# Allegro board BeforeAutoTrace.brd
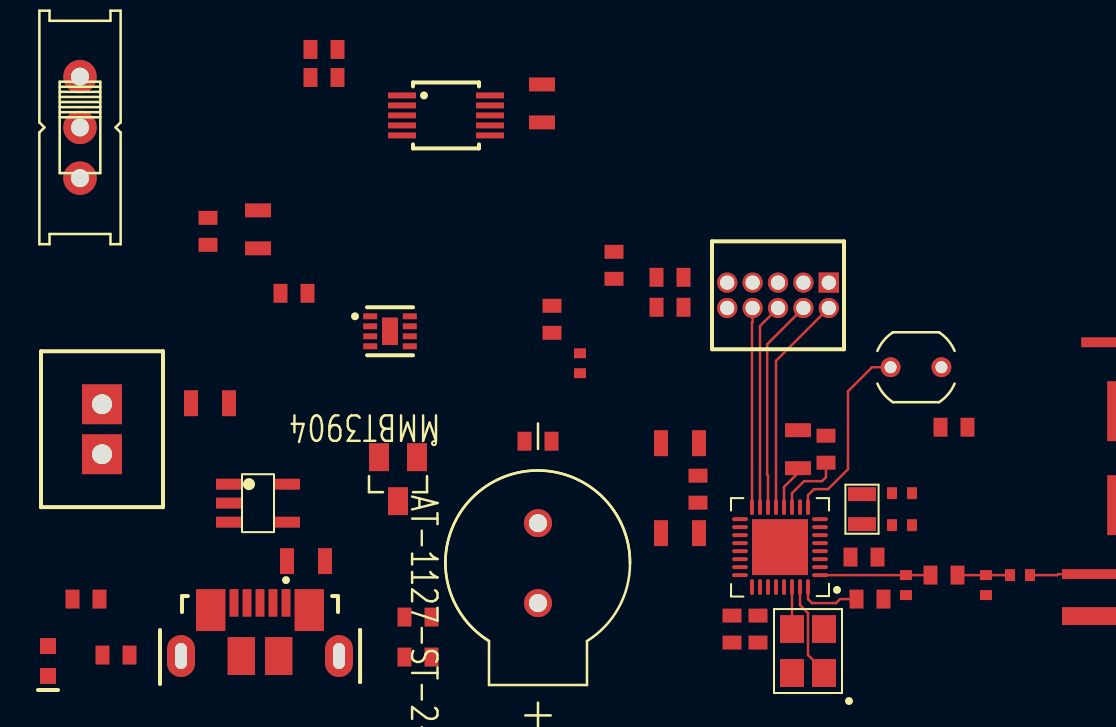
[diagram p0: board, top side]
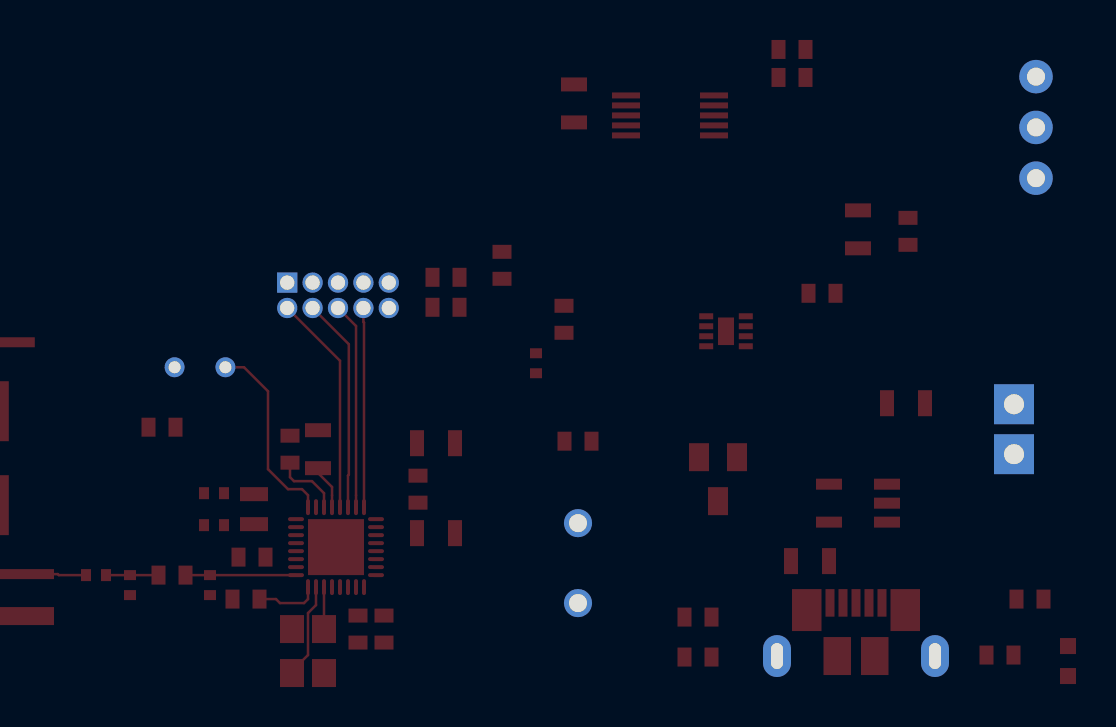
[diagram p1: board, bottom side, seen from below]

No outline. copper layers: TOP, BOTTOM. Coordinates in mm from the lowest, leftmost part position.

## Design rules (mm)
constraint set DEFAULT: min track width 0.127

## Placement (name value [footprint] x y rotation side)
A1  TI AN043  [AN043_PATCH_ANTENNA]  51.2 1.3 270 top
BJT1  MMBT3904  [SOT95P240X120-3N]  17.5 9.1 180 top
BUZ1  AT-1127-ST-2-R  [XDCR_AT-1127-ST-2-R]  24.5 4.9 270 top
C1  12p  [0402_C]  42.7 6.8 0 top
C2  12p  [0402_C]  42.7 8.4 0 top
C3  1uF  [0805_C]  37.5 10.6 270 top
C4  100nF  [0603_C]  38.9 10.6 90 top
C5  100nF  [0603_C]  34.2 1.6 270 top
C6  10uF  [0805_C]  31.6 6.4 180 top
C7  10uF  [0805_C]  31.6 10.9 180 top
C8  100nF  [0603_C]  28.3 19.8 90 top
C9  100nF  [0603_C]  41.1 3.1 0 top
C10  100nF  [0603_C]  35.5 1.6 270 top
C11  12pF  [0402_C]  48.6 4.3 0 top
C12  1.2pF  [0402_C]  42.9 3.8 270 top
C13  1.2pF  [0402_C]  46.9 3.8 270 top
C14  100nF  [0603_C]  31.1 17.7 180 top
C15  330nF  [0603_C]  25.2 17.1 270 top
C16  10uF  [0805_C]  24.7 27.9 90 top
C17  10uF  [0805_C]  10.5 21.6 270 top
C18  1uF  [0805_C]  8.1 12.9 0 top
C19  100nF  [0603_C]  8 21.5 270 top
C20  1uF  [0805_C]  12.9 5 0 top
CHC1  MAXIM MAX1555  [SMD_MAX1555]  10.5 7.9 270 top
CON1  JST B2B-XH-A LF SN  [B2B-XH-A]  2.7 11.6 90 top
CYS1  24MHz  [TSX-3225_XTAL]  38 0.5 90 top
CYS2  32.768MHz  [SC-20S_XTAL]  40.7 7.6 90 top
FG1  MAXIM MAX17048  [MAX17048]  17.1 16.5 270 top
J1  SAMTEC FTSH-105-01-L-D-K  [SAMTEC_FTSH-105-01-L-D-K]  36.5 18.3 180 top
L1  10uH  [0603_L]  32.5 8.6 90 top
L2  FerriteBead  [0402_L]  26.6 14.9 270 top
L3  15nH  [0603_L]  40.8 5.2 0 top
L4  2nH  [0603_L]  44.8 4.3 0 top
LED1  GEN  [0603_LED]  0 0 90 top
LS1  -  [PDV-P8001]  43.4 14.7 0 top
M1  TI CC2640R2F RSM  [CC2640R2FRSM]  36.6 5.7 90 top
R1  33  [0603_R]  18.5 2.2 0 top
R2  2k  [0603_R]  24.5 11 180 top
R3  2k  [0603_R]  45.3 11.7 0 top
R4  100K  [0603_R]  31.1 19.2 0 top
R5  33K  [0603_R]  3.4 0.3 0 top
R6  3.3K  [0603_R]  12.3 18.4 180 top
R7  220  [0603_R]  13.8 29.2 0 top
R8  220  [0603_R]  13.8 30.6 0 top
R9  200  [0603_R]  1.9 3.1 180 top
R10  33K  [0603_R]  18.5 0.2 0 top
SW1  SIS  [EG1218]  1.6 26.7 270 top
USB1  MOLEX 1051640001  [MOLEX_105164-0001]  10.6 1.8 0 top
VR1  MAXIM MAX1759  [MAX1759]  19.9 27.3 270 top

## Library data of the parts
A1 = ANTENNA
BJT1 = MMBT3904
BUZ1 = AT-1127-ST-2-R
C1-C20 = CAP
CHC1 = MAX1555
CON1 = JST B2B-XH-A LF SN
CYS1 = CRYSTAL_24M
CYS2 = CRYSTAL_32768
FG1 = MAXIM MAX17048
J1 = SAMTEC FTSH-105-01-L-D-K
L1 L3 L4 = IND
L2 = FerriteBead
LED1 = LED
LS1 = PDV-P8001
M1 = CC2640
R1-R10 = RES
SW1 = SIS
USB1 = MOLEX 1051640001
VR1 = MAX1759

## Footprints (pads in the part's own frame, mm; a bottom-side part is the same pattern mirrored in y, then rotated)
0402_C
  rect 0.5x0.6 smd: 1(-0.5,0) 2(0.5,0)
0402_L
  rect 0.5x0.6 smd: 1(-0.5,0) 2(0.5,0)
0603_C
  rect 0.7x0.95 smd: 1(-0.675,0) 2(0.675,0)
0603_L
  rect 0.7x0.95 smd: 1(-0.675,0) 2(0.675,0)
0603_LED
  rect 0.8x0.8 smd: 1(-0.75,0) 2(0.75,0)
0603_R
  rect 0.7x0.95 smd: 1(-0.675,0) 2(0.675,0)
0805_C
  rect 0.7x1.3 smd: 1(-0.95,0) 2(0.95,0)
AN043_PATCH_ANTENNA
  rect 0.9x0.5 smd: 1(-0.95,-0.25)
  rect 0.5x0.5 smd: 2(-3.05,-0.25)
B2B-XH-A
  rect 2x2 hole 1: 1(-1.25,0) 2(1.25,0)
CC2640R2FRSM
  rrect 0.2x0.8 smd: 1(-1.4,-2) 2(-1,-2) 3(-0.6,-2) 4(-0.2,-2) 5(0.2,-2) 6(0.6,-2) 7(1,-2) 8(1.4,-2) 24(-1.4,2)
  rrect 0.8x0.2 smd: 9(2,-1.4) 10(2,-1) 11(2,-0.6) 12(2,-0.2) 13(2,0.2) 14(2,0.6) 15(2,1) 16(2,1.4) 25(-2,1.4) 26(-2,1) 27(-2,0.6) 28(-2,0.2) 29(-2,-0.2) 30(-2,-0.6) 31(-2,-1) 32(-2,-1.4)
  rrect 0.2x0.8 smd rot 0.2: 17(1.4,2) 18(1,2) 19(0.6,2) 20(0.2,2) 21(-0.2,2) 22(-0.6,2) 23(-1,2)
  rect 2.8x2.8 smd: 33(0,0)
EG1218
  round 1.676 hole 0.9: O(-2.54,0) P(0,0) S(2.54,0)
MAX1759
  rect 0.3x1.4 smd: 1(-1,-2.2) 2(-0.5,-2.2) 3(0,-2.2) 4(0.5,-2.2) 5(1,-2.2) 6(1,2.2) 7(0.5,2.2) 8(0,2.2) 9(-0.5,2.2) 10(-1,2.2)
MAX17048
  rect 0.3x0.7 smd: 1(-0.75,-0.99) 2(-0.25,-0.99) 3(0.25,-0.99) 4(0.75,-0.99) 5(0.75,0.99) 6(0.25,0.99) 7(-0.25,0.99) 8(-0.75,0.99)
  rect 1.38x0.8 smd: 9(0,0)
MOLEX_105164-0001
  rect 0.45x1.38 smd: 1(1.3,1.11) 2(0.65,1.11) 3(0,1.11) 4(-0.65,1.11) 5(-1.3,1.11)
  rect 1.375x1.9 smd: P1(-0.938,-1.55) P2(0.938,-1.55)
  rect 1.475x2.1 smd: P3(-2.462,0.75) P4(2.462,0.75)
  oval 1.4x2.1 hole 0.6x1.3: S1(-3.95,-1.55) S2(3.95,-1.55)
PDV-P8001
  round 1 hole 0.6: 1(-1.27,0) 2(1.27,0)
SAMTEC_FTSH-105-01-L-D-K
  rect 1.016x1.016 hole 0.711: 1(-2.54,-0.635)
  round 1.016 hole 0.711: 2(-2.54,0.635) 3(-1.27,-0.635) 4(-1.27,0.635) 5(0,-0.635) 6(0,0.635) 7(1.27,-0.635) 8(1.27,0.635) 9(2.54,-0.635) 10(2.54,0.635)
SC-20S_XTAL
  rect 0.7x1.4 smd: 1(-0.75,0) 2(0.75,0)
SMD_MAX1555
  rect 0.55x1.3 smd: 1(-0.95,-1.45) 2(0,-1.45) 3(0.95,-1.45) 4(0.95,1.45) 5(-0.95,1.45)
SOT95P240X120-3N
  rect 1x1.4 smd: 1(-0.95,-1.1) 2(0.95,-1.1) 3(0,1.1)
TSX-3225_XTAL
  rect 1.4x1.2 smd: 1(-1.1,-0.8) 2(1.1,-0.8) 3(1.1,0.8) 4(-1.1,0.8)
XDCR_AT-1127-ST-2-R
  round 1.408 hole 0.9: N(-2,0) P(2,0)

## Nets
GND: A1.1(-) BJT1.2(E) C1.2(B) C2.2(B) C3.1 C4.2(B) C5.2(B) C6.2(B) C7.2(B) C8.2(B) C9.2(B) C10.2(B) C12.2(B) C13.2(B) C14.2(B) C16.2(B) C17.2(B) C18.2(B) C19.2(B) C20.2(B) CHC1.2 CON1.1 CYS1.2 CYS1.4 FG1.1 FG1.4 FG1.6 FG1.9 J1.3 J1.5 J1.9 M1.3 M1.7 M1.17 M1.20 M1.29 M1.33 R3.2(B) R5.1 R10.2(B) USB1.5 VR1.5 VR1.6 VR1.10
VCC: C16.1 J1.1 L2.1 R6.1 VR1.9
VDDR: C7.1 C9.1 C10.1 L1.2(B) M1.28 M1.32
VDDS: C4.1 C5.1 C6.1 C8.1 L2.2(B) M1.11 M1.19 M1.27 R4.1
ALRTN: FG1.5 M1.24 R6.2(B)
ANTENNA: A1.2 C11.2(B)
BAT+: C18.1 C19.1 CHC1.5 CON1.2 FG1.2 FG1.3(VDD) SW1.P
BUZ: M1.10 R2.1
BUZ_IN: BUZ1.P R1.2(B)
BUZZNEG: BJT1.3 BUZ1.N
CHG: CHC1.3 LED1.1(-)
CXN: C15.2(B) VR1.7
CXP: C15.1 VR1.8
DC: C20.1 CHC1.4 R9.1 USB1.1
DCDC_IN: C17.1 R1.1 SW1.S VR1.2(SHDN) VR1.3 VR1.4
DCDC_SW: L1.1 M1.18
DCOUPL: C3.2(B) M1.12
FILTER: C11.1 C13.1 L4.2(B)
LED: LED1.2 M1.8 R9.2(B)
RESET: C14.1 J1.10 M1.21 R4.2(B)
RF_N: L3.1 M1.2
RF_P: C12.1 L3.2(B) L4.1 M1.1
SCL: M1.26 R7.2(B)
SCL_OUT: FG1.7 R7.1
SDA: M1.25 R8.2(B)
SDA_OUT: FG1.8 R8.1
SENSOR_MTR: LS1.2(PS2) M1.22 R3.1
SENSOR_ON: LS1.1 M1.9
TCKC: J1.4 M1.14
TDI: J1.8 M1.16
TDO: J1.6 M1.15
TMSC: J1.2 M1.13
TRB: BJT1.1 R2.2(B)
X24M_N: CYS1.3 M1.30
X24M_P: CYS1.1 M1.31
X32K_Q1: C1.1 CYS2.1 M1.5
X32K_Q2: C2.1 CYS2.2(B) M1.6(X32K_Q2)
N183563: R5.2(B) USB1.S1
N183606: R10.1 USB1.S2(SHIELD2)

Pads without a net: CHC1 1; J1 7; M1 4 23; SW1 O; USB1 2 3 4 P1 P2 P3 P4; VR1 1

## Routing (per net, layer and track width the routed paths; a pad name or vN(x,y) marks a point on that pad's centre or on a via; arc(x,y) is an arc through that point)
VDDR: length 3.2
  TOP w0.127: M1.32 38,3.1 38.2,2.9 39.4,2.9 39.6,3.1 40.43,3.1
VDDS: length 3.5
  TOP w0.127: 38.9,9.92 38.9,9.2 38.7,9 37.8,9 37.2,8.4 M1.11
ANTENNA: length 1.9
  TOP w0.127: A1.2 50.51,4.35 50.46,4.3 C11.2
DCOUPL: length 2.2
  TOP w0.127: M1.12 36.8,8.29 36.8,8.71 37.5,9.41 C3.2
FILTER: length 2.6
  TOP w0.127: C11.1 C13.1 45.48,4.3
RF_P: length 5.5
  TOP w0.127: L4.1 C12.1 M1.1
SENSOR_ON: length 9.7
  TOP w0.127: M1.9 38,8.3 38.3,8.6 39,8.6 40,9.6 40,13.5 41.2,14.7 LS1.1
TCKC: length 10.7
  TOP w0.127: J1.4 35.96,15.85 35.96,9.32 36,9.28 M1.14
TDI: length 10
  TOP w0.127: M1.16 35.2,16.94 35.23,16.97 J1.8
TDO: length 10.3
  TOP w0.127: M1.15 35.6,8.29 35.6,16.76 J1.6
TMSC: length 11.1
  TOP w0.127: J1.2 36.4,15.03 M1.13
X24M_N: length 2.1
  TOP w0.127: CYS1.3 M1.30
X24M_P: length 4.8
  TOP w0.127: CYS1.1 38.8,-0.5 38,0.3 38,2.4 37.6,2.8 M1.31

## Copper pours and planes (outline as drawn; the poured copper is in the pictures)
ANTENNA on TOP (solid shape): 56.1,13.5 53.46,13.5 53.46,11.5 56.1,11.5 56.1,8.8 53.46,8.8 53.46,6.8 56.1,6.8 56.1,1.8 51.2,1.8 51.2,2.7 55.6,2.7 55.6,4.1 51.2,4.1 51.2,4.6 55.6,4.6 55.6,6.3 52.96,6.3 52.96,9.3 55.6,9.3 55.6,11 52.96,11 52.96,14 55.6,14 55.6,15.7 51.66,15.7 51.66,16.2 56.1,16.2
